# EAGLE board Power Supply managment (EAGLE 9.7.0)

Size 91.39 x 126.29 mm. Coordinates in mm from the lower left corner, seen from the top.
Outline: 0,0 91.39,0 91.39,126.29 0,126.29 0,0
Copper layers (1*16): Top 0.035mm / dielectric 1.5mm / Bottom 0.035mm
Design rules "default": minimum track width 6mil, minimum drill 0.35mm, track to track 6mil, track to pad 6mil, pad to pad 6mil, via to via 6mil, smd to smd 6mil, copper to edge 40mil, drill to drill 6mil, minimum pad ring 10mil, minimum via ring 8mil, stop-mask expansion 4mil, vias tented up to drill 0mil, thermal gap 10mil

## Footprints (pad centres in the part's own frame; a part is rotated, then mirrored left to right if it is on the bottom)
BATTERY-GENERIC = drill 1.118 pad 3.15 octagon: + 2.54,0; - -2.54,0
CAPPRD254W65D500H1150B = drill 0.85 pad 1.45: 1 -1.27,0; 2 1.27,0
1X08 = drill 1.016 long: 1 -8.89,0; 2 -6.35,0; 3 -3.81,0; 4 -1.27,0; 5 1.27,0; 6 3.81,0; 7 6.35,0; 8 8.89,0
LU-5-R = drill 0.8: 1 -6.35,-3.81; 5 3.81,-3.81; 6 6.35,-3.81; 7 6.35,3.81; 8 3.81,3.81; 12 -6.35,3.81
RESAD1016W63L850D250B = drill 0.83 pad 1.43: 1 -5.08,0; 2 5.08,0
SWITCH-MOMENTARY-PTH-6.5MM = drill 1.016 pad 1.88: 1 -3.251,2.261; 2 3.251,2.261; 3 -3.251,-2.261; 4 3.251,-2.261
TO220V = drill 1.016 long: 1 -2.54,-2.54; 2 0,-2.54; 3 2.54,-2.54

## Placement (x,y rotation side)
BAT1  9V  [BATTERY-GENERIC]  26.69,118.04 270 top
C1  1u  [CAPPRD254W65D500H1150B]  62.21,66.39 180 top
C2  1u  [CAPPRD254W65D500H1150B]  77.45,89.25 180 top
JP1  PINHD-1X08_1X08M  [1X08]  85.12,13.34 270 top
K2  RELAY-SPDT_LU-5-R  [LU-5-R]  45.7,75.28 180 top
K3  RELAY-SPDT_LU-5-R  [LU-5-R]  17.76,75.28 180 top
R3  782  [RESAD1016W63L850D250B]  6.33,94.33 270 top
SPOWER_ON_BUTTON  SWITCH_MOMENTARY  [SWITCH-MOMENTARY-PTH-6.5MM]  31.73,75.28 90 top
U1  LM7805_TO220V  [TO220V]  69.83,89.25 0 top

## Library data of the parts
BAT1 C1 C2 JP1 K2 K3 R3 SPOWER_ON_BUTTON U1 = Tinkercad

## Nets
BAT1+: BAT1.+ C2.1 K3.8 R3.2 U1.1
K2_COIL2: JP1.3 K2.8
K2_COM2: K2.1 K2.12
K3_COM2: K2.7 K3.1 K3.12
SPOWER_ON_BUTTON_1: K3.7 SPOWER_ON_BUTTON.1 SPOWER_ON_BUTTON.2
SPOWER_ON_BUTTON_3: C1.2 C2.2 JP1.2 K2.5 K3.5 K3.6 R3.1 SPOWER_ON_BUTTON.3 SPOWER_ON_BUTTON.4 U1.2
U1_VO: C1.1 JP1.1 U1.3

## Tracks (layer width: path | path; a pad name or v marks a point on that pad's centre or on a via)
BAT1+  (4 unrouted)
K2_COIL2  (1 unrouted)
K2_COM2  (1 unrouted)
K3_COM2  (2 unrouted)
SPOWER_ON_BUTTON_1  (2 unrouted)
SPOWER_ON_BUTTON_3  (9 unrouted)
U1_VO  (2 unrouted)